# EAGLE board Parallel CS V5 repeated (EAGLE 7.2.0), part 1 of 2
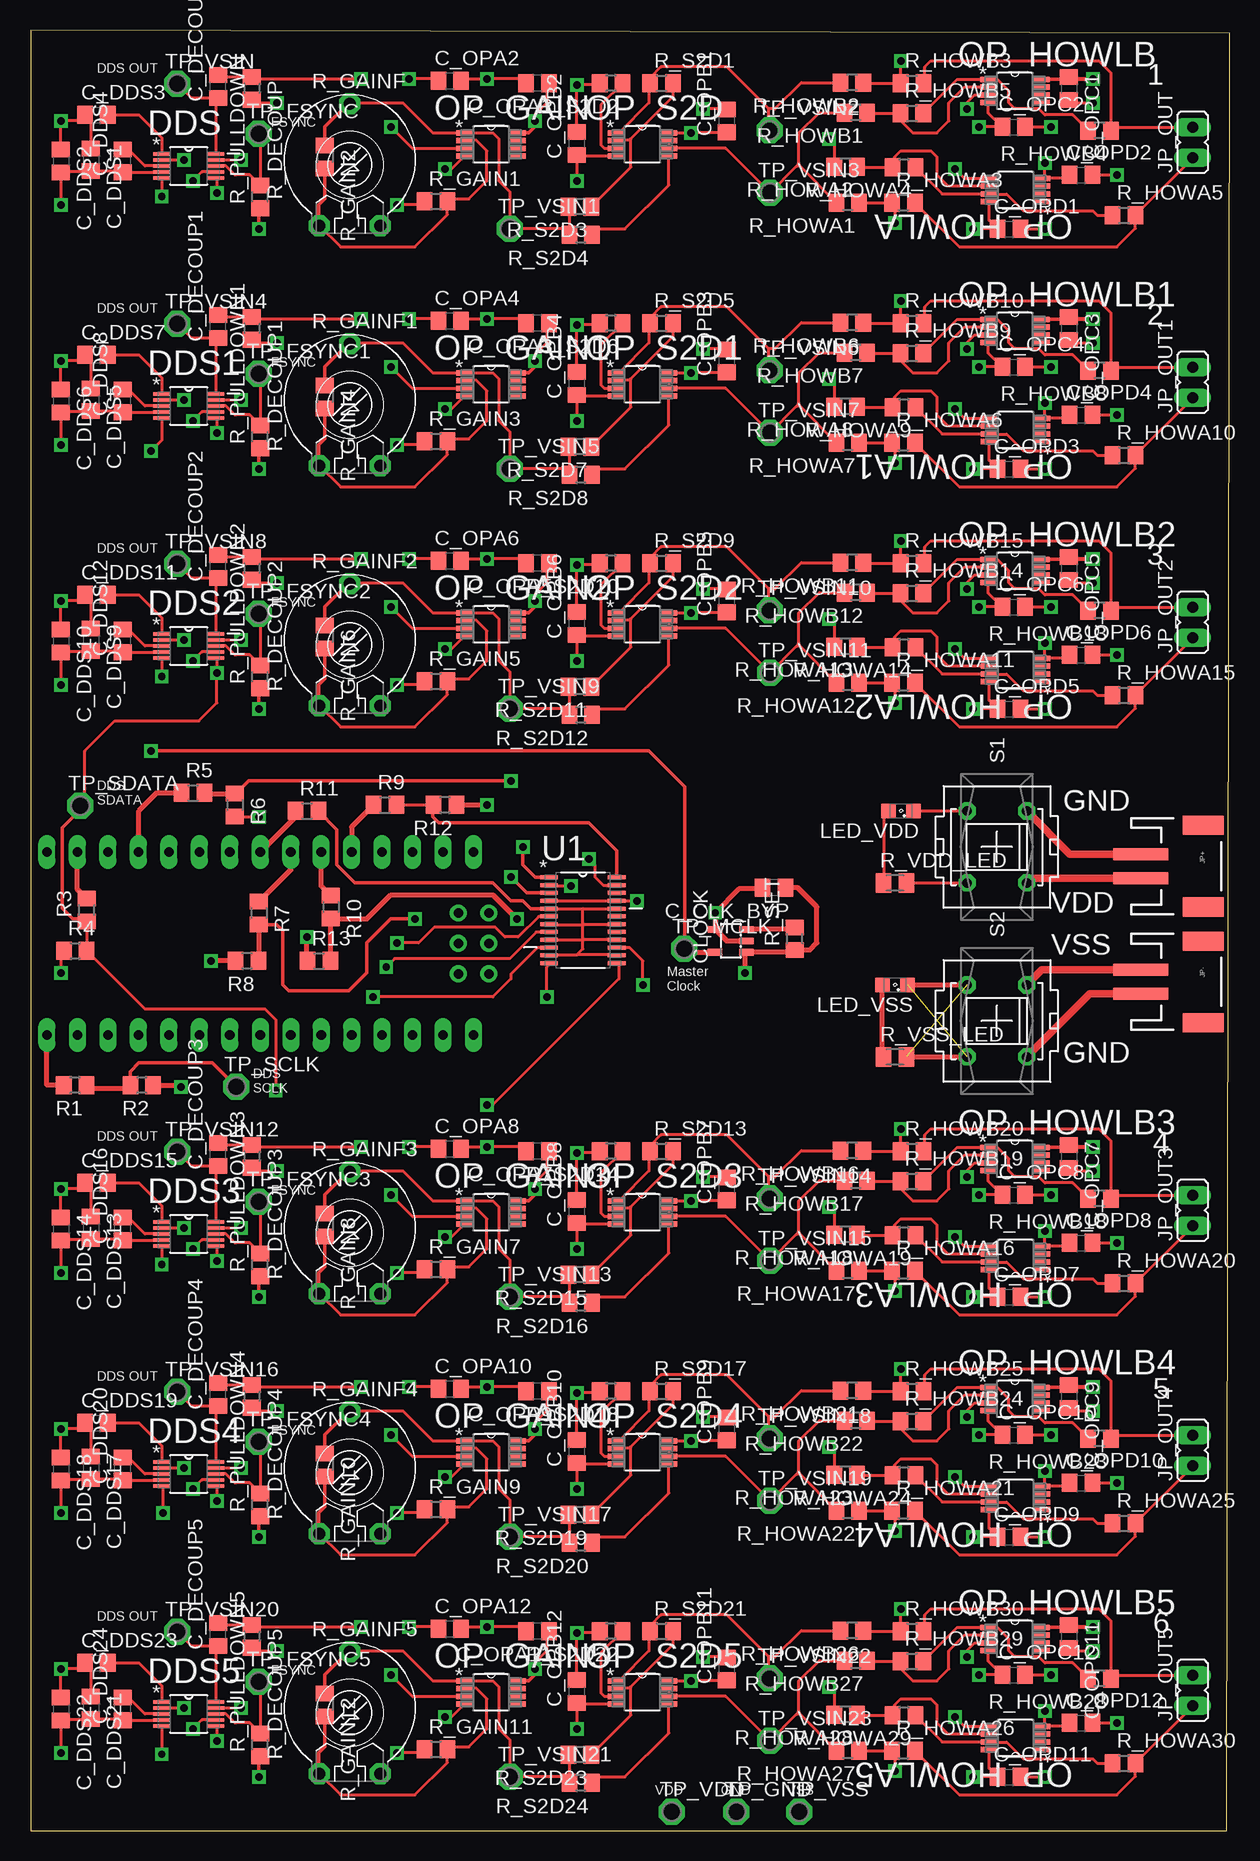
[diagram p0: board, top side]
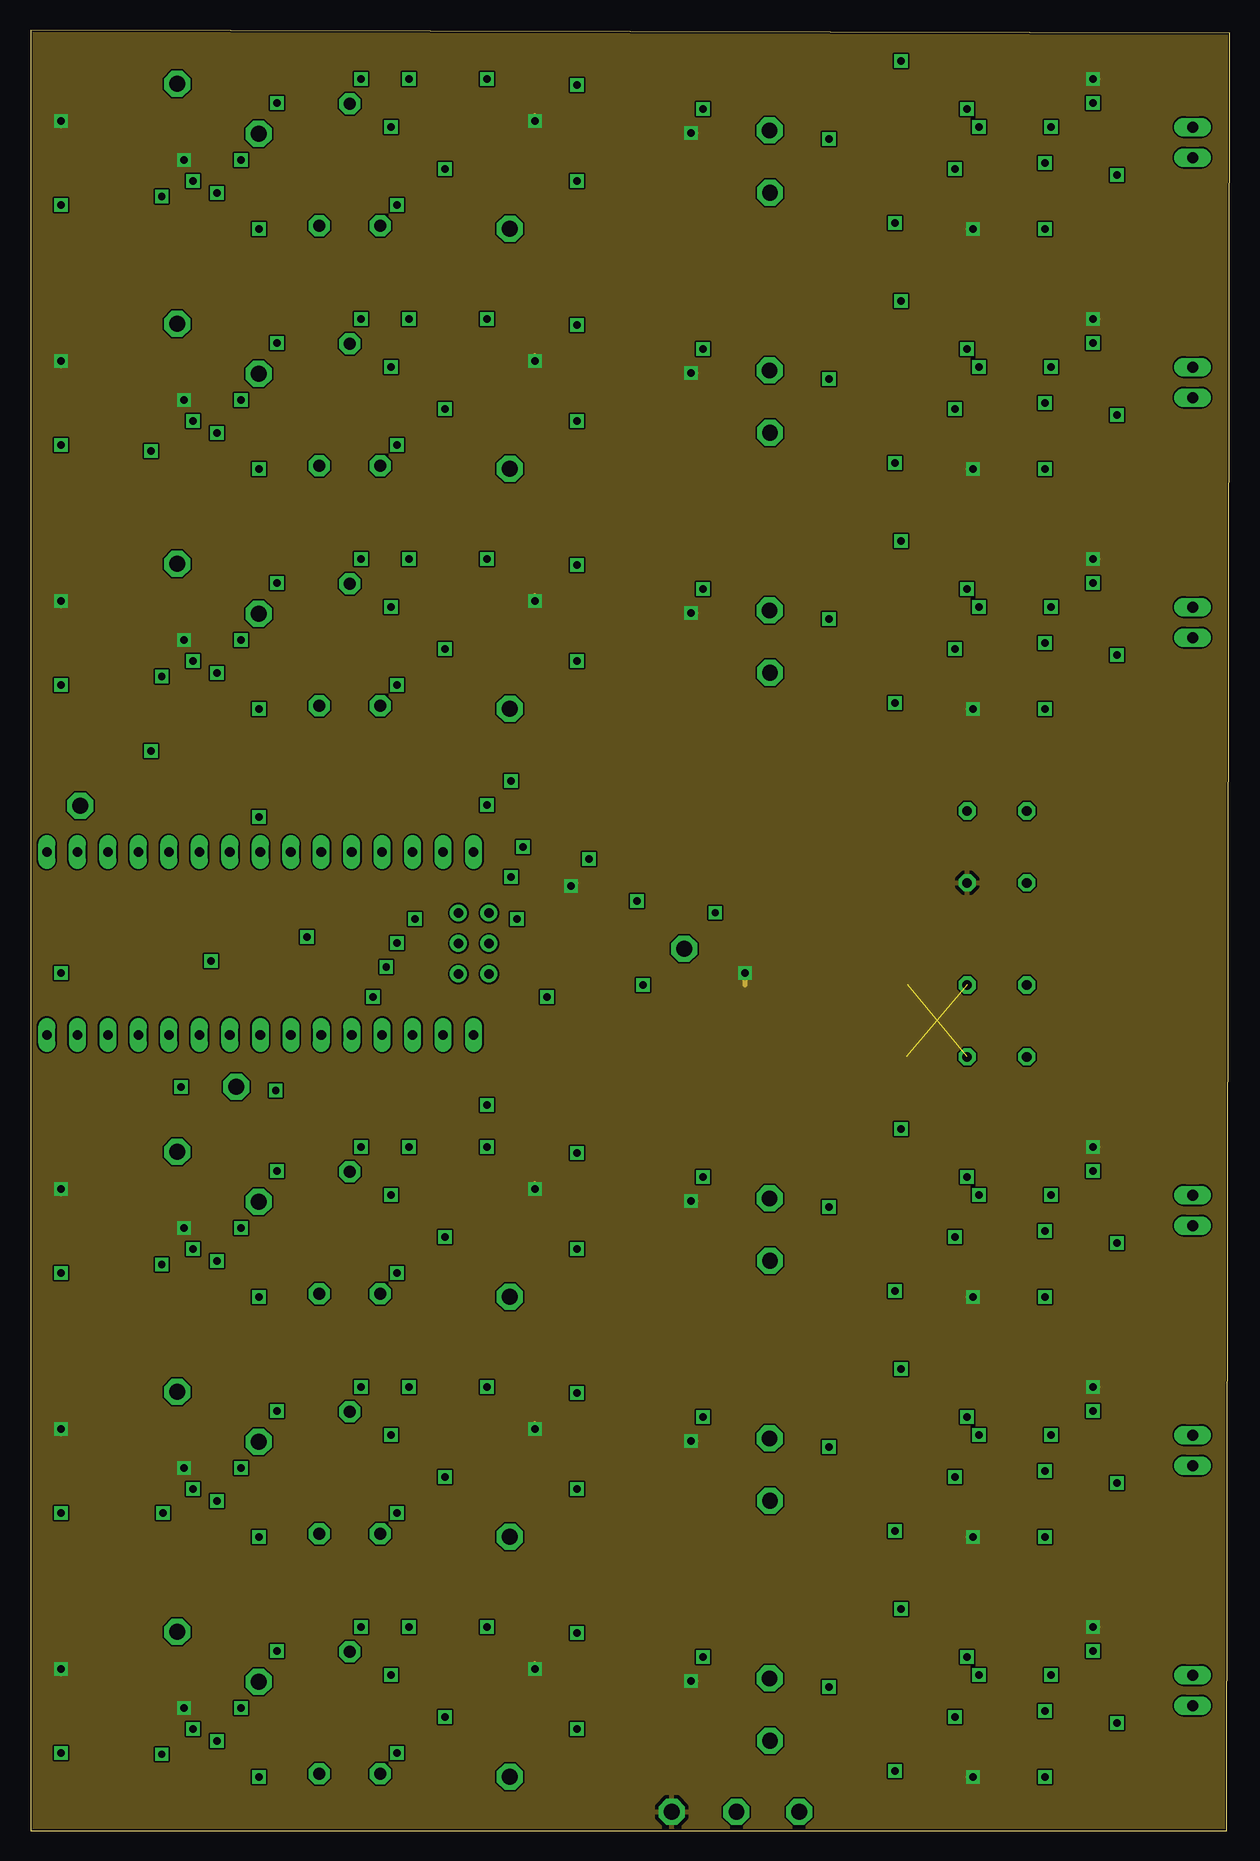
[diagram p1: board, inner layer VDD]
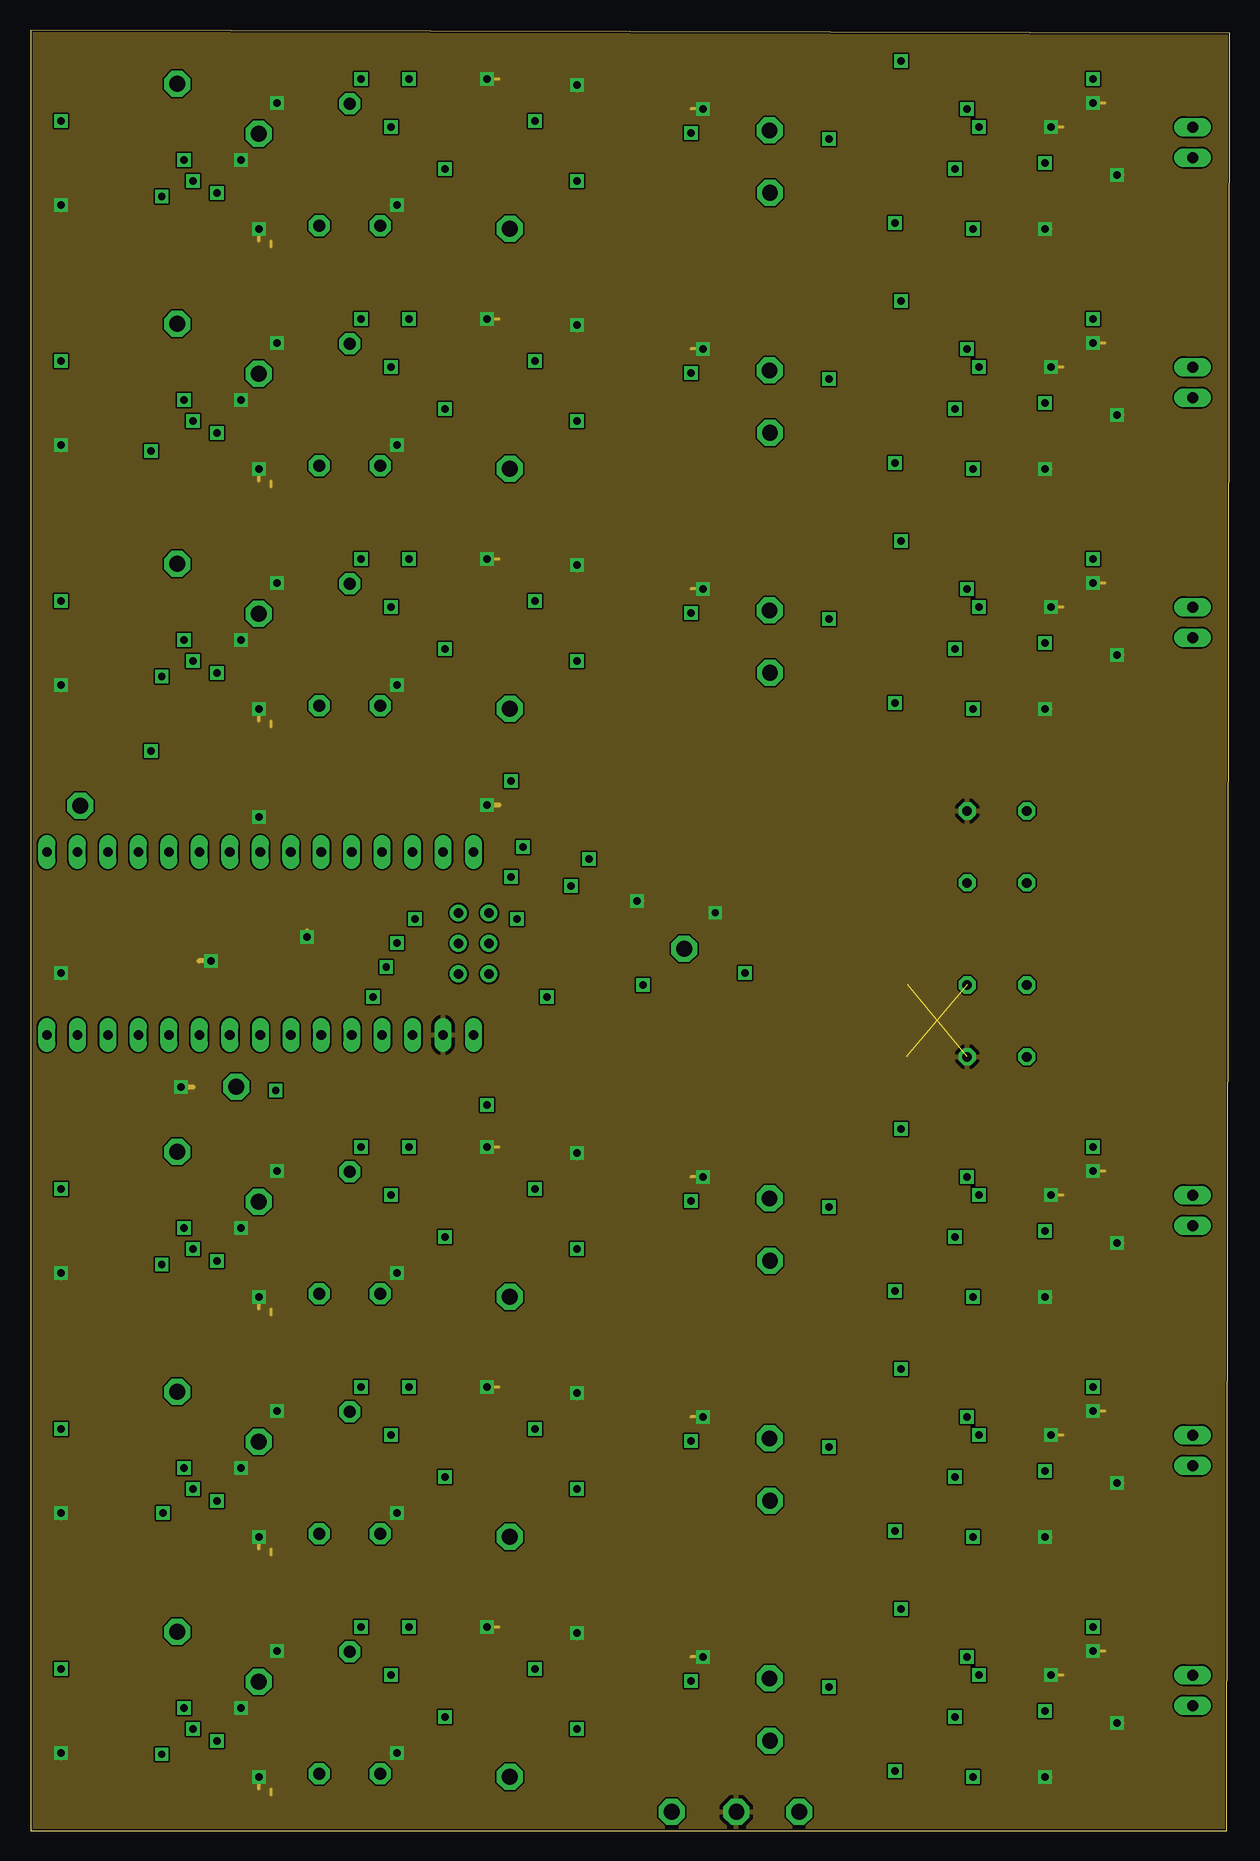
[diagram p2: board, inner layer GND]
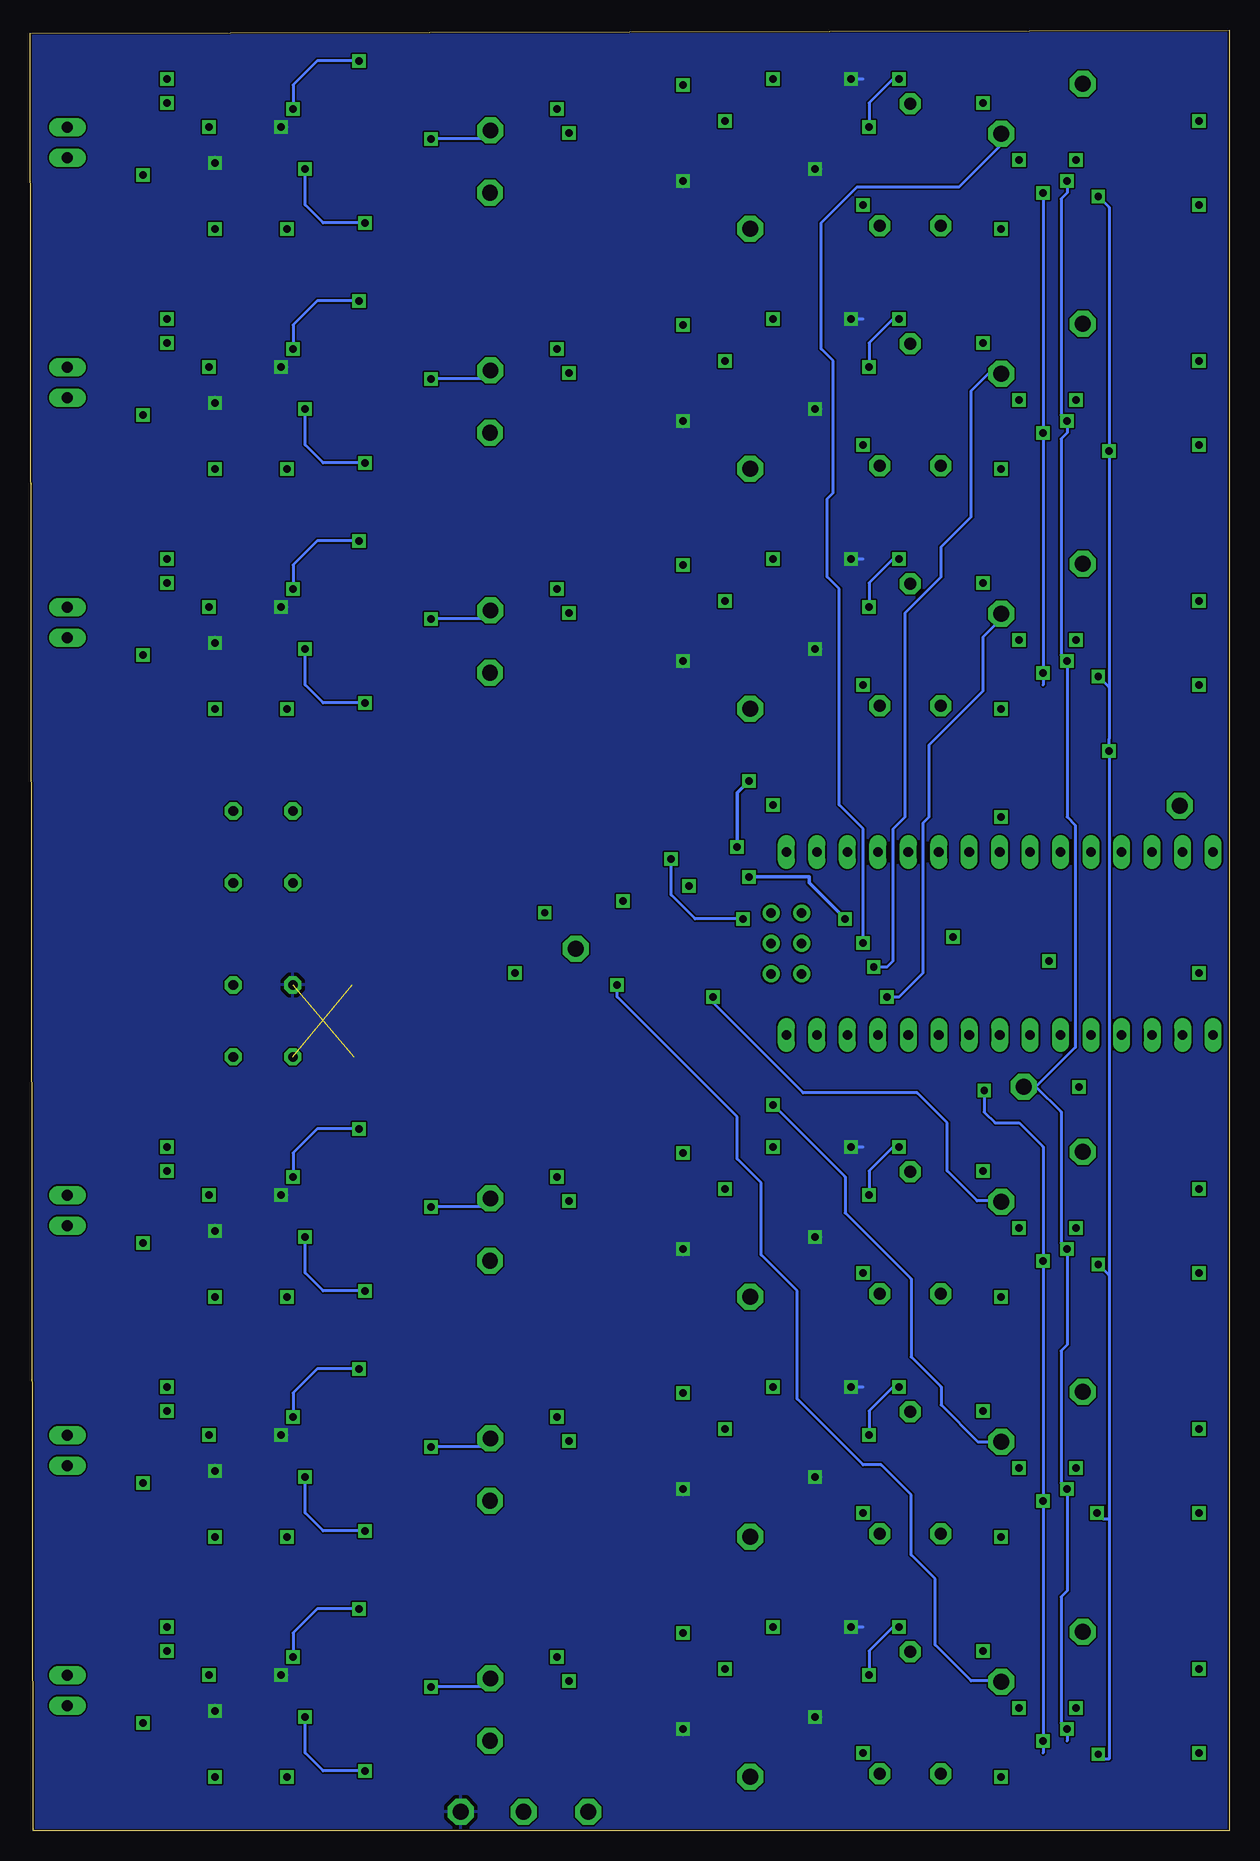
[diagram p3: board, bottom side, seen from below]

Size 99.92 x 150.08 mm. Coordinates in mm from the lower left corner, seen from the top.
Outline: 0,0 99.65,0 99.92,149.81 0,150.08 0,0
Copper layers (1*2*15*16): Top 0.035mm / dielectric 1.5mm / VDD 0.035mm / dielectric 0.15mm / GND 0.035mm / dielectric 0.2mm / Bottom 0.035mm
Design rules "SparkFun-4-layer": minimum track width 6mil, minimum drill 13mil, track to track 6mil, track to pad 6mil, pad to pad 6mil, via to via 6mil, smd to smd 6mil, copper to edge 6mil, drill to drill 8mil, minimum pad ring 12mil, minimum via ring 10mil, stop-mask expansion 4mil, vias tented up to drill 20mil, thermal gap 12mil

## Footprints (pad centres in the part's own frame; a part is rotated, then mirrored left to right if it is on the bottom)
C0805 = smd 1.3 x 1.5: 1 -0.95,0; 2 0.95,0
SOT23-5L = smd 0.55 x 1.2: 1 -0.95,-1.3; 2 0,-1.3; 3 0.95,-1.3; 4 0.95,1.3; 5 -0.95,1.3
SOP50P490X110-10N = smd 1.422 x 0.305: 1 -2.235,0.991; 2 -2.235,0.508; 3 -2.235,0; 4 -2.235,-0.508; 5 -2.235,-0.991; 6 2.235,-0.991; 7 2.235,-0.508; 8 2.235,0; 9 2.235,0.508; 10 2.235,0.991
JST-2-SMD = smd 1 x 4.6: 1 -1,-3.7; 2 1,-3.7 | smd 1.6 x 3.4: NC1 -3.4,1.5; NC2 3.4,1.5
JP1 = drill 0.914 long: 1 0,-1.27; 2 0,1.27
SML0805 = smd 1.2 x 1.2: A 1.05,0; C -1.05,0
SOP65P490X109-8N = smd 1.372 x 0.457: 1 -2.21,0.965; 2 -2.21,0.33; 3 -2.21,-0.33; 4 -2.21,-0.965; 5 2.21,-0.965; 6 2.21,-0.33; 7 2.21,0.33; 8 2.21,0.965
R0805 = smd 1.3 x 1.5: 1 -0.95,0; 2 0.95,0
PT-10 = drill 1.016 pad 1.778 octagon: 1 -2.54,-5.08; 2 2.54,-5.08; 3 0,5.08
M0805 = smd 1.3 x 1.6: 1 -0.95,0; 2 0.95,0
PVA1F = drill 0.813 octagon: 1 -2.997,2.489; 2 -2.997,-2.489; 3 2.997,2.489; 4 2.997,-2.489
P1-13 = drill 1.321 pad 2.159 octagon: TP 0,0
SOP65P640X120-24N = smd 1.473 x 0.356: 1 -2.819,3.581; 2 -2.819,2.921; 3 -2.819,2.286; 4 -2.819,1.626; 5 -2.819,0.965; 6 -2.819,0.33; 7 -2.819,-0.33; 8 -2.819,-0.965; 9 -2.819,-1.626; 10 -2.819,-2.286; 11 -2.819,-2.921; 12 -2.819,-3.581; 13 2.819,-3.581; 14 2.819,-2.921; 15 2.819,-2.286; 16 2.819,-1.626; 17 2.819,-0.965; 18 2.819,-0.33; 19 2.819,0.33; 20 2.819,0.965; 21 2.819,1.626; 22 2.819,2.286; 23 2.819,2.921; 24 2.819,3.581
NANO = drill 0.8 long: 3.3V -10.16,24.13; 5V -10.16,-1.27; A0 -10.16,19.05; A1 -10.16,16.51; A2 -10.16,13.97; A3 -10.16,11.43; A4 -10.16,8.89; A5 -10.16,6.35; A6 -10.16,3.81; A7 -10.16,1.27; AREF -10.16,21.59; D2 5.08,1.27; D3 5.08,3.81; D4 5.08,6.35; D5 5.08,8.89; D6 5.08,11.43; D7 5.08,13.97; D8 5.08,16.51; D9 5.08,19.05; D10 5.08,21.59; D11 5.08,24.13; D12 5.08,26.67; D13 -10.16,26.67; GND -10.16,-6.35; GND1 5.08,-1.27; RAW -10.16,-8.89; RST -10.16,-3.81; RST1 5.08,-3.81; RX1 5.08,-6.35; TX0 5.08,-8.89 | drill 0.8: ICSP1 -5.08,-10.16; ICSP2 -5.08,-7.62; ICSP3 -2.54,-10.16; ICSP4 -2.54,-7.62; ICSP5 0,-10.16; ICSP6 0,-7.62

## Placement (x,y rotation side)
C_CLK_BYP  0.1u  [C0805]  61.92,78.59 180 top
C_DDS1  0.1u  [C0805]  5,139.27 270 top
C_DDS2  10u  [C0805]  2.5,139.16 270 top
C_DDS3  10n  [C0805]  5.45,143 0 top
C_DDS4  100n  [C0805]  7.65,139.18 90 top
C_DDS5  0.1u  [C0805]  5,119.27 270 top
C_DDS6  10u  [C0805]  2.5,119.16 270 top
C_DDS7  10n  [C0805]  5.45,123 0 top
C_DDS8  100n  [C0805]  7.65,119.18 90 top
C_DDS9  0.1u  [C0805]  5,99.27 270 top
C_DDS10  10u  [C0805]  2.5,99.16 270 top
C_DDS11  10n  [C0805]  5.45,103 0 top
C_DDS12  100n  [C0805]  7.65,99.18 90 top
C_DDS13  0.1u  [C0805]  5,50.27 270 top
C_DDS14  10u  [C0805]  2.5,50.16 270 top
C_DDS15  10n  [C0805]  5.45,54 0 top
C_DDS16  100n  [C0805]  7.65,50.18 90 top
C_DDS17  0.1u  [C0805]  5,30.27 270 top
C_DDS18  10u  [C0805]  2.5,30.16 270 top
C_DDS19  10n  [C0805]  5.45,34 0 top
C_DDS20  100n  [C0805]  7.65,30.18 90 top
C_DDS21  0.1u  [C0805]  5,10.27 270 top
C_DDS22  10u  [C0805]  2.5,10.16 270 top
C_DDS23  10n  [C0805]  5.45,14 0 top
C_DDS24  100n  [C0805]  7.65,10.18 90 top
C_DECOUP  1u  [C0805]  15.59,145.38 90 top
C_DECOUP1  1u  [C0805]  15.59,125.38 90 top
C_DECOUP2  1u  [C0805]  15.59,105.38 90 top
C_DECOUP3  1u  [C0805]  15.59,56.38 90 top
C_DECOUP4  1u  [C0805]  15.59,36.38 90 top
C_DECOUP5  1u  [C0805]  15.59,16.38 90 top
C_OPA1  0.1u  [C0805]  42.21,145.65 180 top
C_OPA2  0.1u  [C0805]  34.9,145.85 0 top
C_OPA3  0.1u  [C0805]  42.21,125.65 180 top
C_OPA4  0.1u  [C0805]  34.9,125.85 0 top
C_OPA5  0.1u  [C0805]  42.21,105.65 180 top
C_OPA6  0.1u  [C0805]  34.9,105.85 0 top
C_OPA7  0.1u  [C0805]  42.21,56.65 180 top
C_OPA8  0.1u  [C0805]  34.9,56.85 0 top
C_OPA9  0.1u  [C0805]  42.21,36.65 180 top
C_OPA10  0.1u  [C0805]  34.9,36.85 0 top
C_OPA11  0.1u  [C0805]  42.21,16.65 180 top
C_OPA12  0.1u  [C0805]  34.9,16.85 0 top
C_OPB1  0.1u  [C0805]  58,142.51 90 top
C_OPB2  0.1u  [C0805]  45.5,140.62 90 top
C_OPB3  0.1u  [C0805]  58,122.51 90 top
C_OPB4  0.1u  [C0805]  45.5,120.62 90 top
C_OPB5  0.1u  [C0805]  58,102.51 90 top
C_OPB6  0.1u  [C0805]  45.5,100.62 90 top
C_OPB7  0.1u  [C0805]  58,53.51 90 top
C_OPB8  0.1u  [C0805]  45.5,51.62 90 top
C_OPB9  0.1u  [C0805]  58,33.51 90 top
C_OPB10  0.1u  [C0805]  45.5,31.62 90 top
C_OPB11  0.1u  [C0805]  58,13.51 90 top
C_OPB12  0.1u  [C0805]  45.5,11.62 90 top
C_OPC1  0.1u  [C0805]  86.5,145.21 270 top
C_OPC2  0.1u  [C0805]  81.9,142 0 top
C_OPC3  0.1u  [C0805]  86.5,125.21 270 top
C_OPC4  0.1u  [C0805]  81.9,122 0 top
C_OPC5  0.1u  [C0805]  86.5,105.21 270 top
C_OPC6  0.1u  [C0805]  81.9,102 0 top
C_OPC7  0.1u  [C0805]  86.5,56.21 270 top
C_OPC8  0.1u  [C0805]  81.9,53 0 top
C_OPC9  0.1u  [C0805]  86.5,36.21 270 top
C_OPC10  0.1u  [C0805]  81.9,33 0 top
C_OPC11  0.1u  [C0805]  86.5,16.21 270 top
C_OPC12  0.1u  [C0805]  81.9,13 0 top
C_OPD1  0.1u  [C0805]  81.5,133.5 0 top
C_OPD2  0.1u  [C0805]  87.5,138 0 top
C_OPD3  0.1u  [C0805]  81.5,113.5 0 top
C_OPD4  0.1u  [C0805]  87.5,118 0 top
C_OPD5  0.1u  [C0805]  81.5,93.5 0 top
C_OPD6  0.1u  [C0805]  87.5,98 0 top
C_OPD7  0.1u  [C0805]  81.5,44.5 0 top
C_OPD8  0.1u  [C0805]  87.5,49 0 top
C_OPD9  0.1u  [C0805]  81.5,24.5 0 top
C_OPD10  0.1u  [C0805]  87.5,29 0 top
C_OPD11  0.1u  [C0805]  81.5,4.5 0 top
C_OPD12  0.1u  [C0805]  87.5,9 0 top
CLOCK  LTC69000  [SOT23-5L]  58.32,74.18 90 top
DDS  AD9833BRMZ  [SOP50P490X110-10N]  13.15,138.75 0 top
DDS1  AD9833BRMZ  [SOP50P490X110-10N]  13.15,118.75 0 top
DDS2  AD9833BRMZ  [SOP50P490X110-10N]  13.15,98.75 0 top
DDS3  AD9833BRMZ  [SOP50P490X110-10N]  13.15,49.75 0 top
DDS4  AD9833BRMZ  [SOP50P490X110-10N]  13.15,29.75 0 top
DDS5  AD9833BRMZ  [SOP50P490X110-10N]  13.15,9.75 0 top
JP+  PWR  [JST-2-SMD]  96.18,80.4 270 top
JP-  PWR  [JST-2-SMD]  96.18,70.75 270 top
JP_OUT  [JP1]  96.8,140.71 0 top
JP_OUT1  [JP1]  96.8,120.71 0 top
JP_OUT2  [JP1]  96.8,100.71 0 top
JP_OUT3  [JP1]  96.8,51.71 0 top
JP_OUT4  [JP1]  96.8,31.71 0 top
JP_OUT5  [JP1]  96.8,11.71 0 top
LED_VDD  [SML0805]  72.5,85 180 top
LED_VSS  [SML0805]  72,70.5 180 top
OP_GAIN  RC4560SOP65  [SOP65P490X109-8N]  38.35,140.55 0 top
OP_GAIN1  RC4560SOP65  [SOP65P490X109-8N]  38.35,120.55 0 top
OP_GAIN2  RC4560SOP65  [SOP65P490X109-8N]  38.35,100.55 0 top
OP_GAIN3  RC4560SOP65  [SOP65P490X109-8N]  38.35,51.55 0 top
OP_GAIN4  RC4560SOP65  [SOP65P490X109-8N]  38.35,31.55 0 top
OP_GAIN5  RC4560SOP65  [SOP65P490X109-8N]  38.35,11.55 0 top
OP_HOWLA  RC4560SOP65  [SOP65P490X109-8N]  82.05,136.75 180 top
OP_HOWLA1  RC4560SOP65  [SOP65P490X109-8N]  82.05,116.75 180 top
OP_HOWLA2  RC4560SOP65  [SOP65P490X109-8N]  82.05,96.75 180 top
OP_HOWLA3  RC4560SOP65  [SOP65P490X109-8N]  82.05,47.75 180 top
OP_HOWLA4  RC4560SOP65  [SOP65P490X109-8N]  82.05,27.75 180 top
OP_HOWLA5  RC4560SOP65  [SOP65P490X109-8N]  82.05,7.75 180 top
OP_HOWLB  RC4560SOP65  [SOP65P490X109-8N]  82,145 0 top
OP_HOWLB1  RC4560SOP65  [SOP65P490X109-8N]  82,125 0 top
OP_HOWLB2  RC4560SOP65  [SOP65P490X109-8N]  82,105 0 top
OP_HOWLB3  RC4560SOP65  [SOP65P490X109-8N]  82,56 0 top
OP_HOWLB4  RC4560SOP65  [SOP65P490X109-8N]  82,36 0 top
OP_HOWLB5  RC4560SOP65  [SOP65P490X109-8N]  82,16 0 top
OP_S2D  RC4560SOP65  [SOP65P490X109-8N]  50.95,140.55 0 top
OP_S2D1  RC4560SOP65  [SOP65P490X109-8N]  50.95,120.55 0 top
OP_S2D2  RC4560SOP65  [SOP65P490X109-8N]  50.95,100.55 0 top
OP_S2D3  RC4560SOP65  [SOP65P490X109-8N]  50.95,51.55 0 top
OP_S2D4  RC4560SOP65  [SOP65P490X109-8N]  50.95,31.55 0 top
OP_S2D5  RC4560SOP65  [SOP65P490X109-8N]  50.95,11.55 0 top
R1  10k  [R0805]  3.68,62.15 180 top
R2  20k  [R0805]  9.23,62.15 180 top
R3  10k  [R0805]  4.65,76.74 90 top
R4  20k  [R0805]  3.69,73.35 0 top
R5  10k  [R0805]  13.5,86.5 0 top
R6  20k  [R0805]  17,85.5 270 top
R7  10k  [R0805]  19,76.5 270 top
R8  20k  [R0805]  18,72.5 180 top
R9  10k  [R0805]  29.5,85.5 0 top
R10  10k  [R0805]  25,77 270 top
R11  10k  [R0805]  23,85 0 top
R12  20k  [R0805]  34.5,85.5 180 top
R13  20k  [R0805]  24,72.5 0 top
R_DECOUP  10k  [R0805]  18.41,145.22 270 top
R_DECOUP1  10k  [R0805]  18.41,125.22 270 top
R_DECOUP2  10k  [R0805]  18.41,105.22 270 top
R_DECOUP3  10k  [R0805]  18.41,56.22 270 top
R_DECOUP4  10k  [R0805]  18.41,36.22 270 top
R_DECOUP5  10k  [R0805]  18.41,16.22 270 top
R_GAIN1  10k  [R0805]  33.75,135.8 0 top
R_GAIN2  1  [R0805]  24.5,139.5 270 top
R_GAIN3  10k  [R0805]  33.75,115.8 0 top
R_GAIN4  1  [R0805]  24.5,119.5 270 top
R_GAIN5  10k  [R0805]  33.75,95.8 0 top
R_GAIN6  1  [R0805]  24.5,99.5 270 top
R_GAIN7  10k  [R0805]  33.75,46.8 0 top
R_GAIN8  1  [R0805]  24.5,50.5 270 top
R_GAIN9  10k  [R0805]  33.75,26.8 0 top
R_GAIN10  1  [R0805]  24.5,30.5 270 top
R_GAIN11  10k  [R0805]  33.75,6.8 0 top
R_GAIN12  1  [R0805]  24.5,10.5 270 top
R_GAINF  [PT-10]  26.57,138.85 0 top
R_GAINF1  [PT-10]  26.57,118.85 0 top
R_GAINF2  [PT-10]  26.57,98.85 0 top
R_GAINF3  [PT-10]  26.57,49.85 0 top
R_GAINF4  [PT-10]  26.57,29.85 0 top
R_GAINF5  [PT-10]  26.57,9.85 0 top
R_HOWA1  100k  [R0805]  68.07,135.7 180 top
R_HOWA2  100k  [R0805]  67.89,138.7 180 top
R_HOWA3  100k  [R0805]  72.71,135.7 0 top
R_HOWA4  100k  [R0805]  72.75,138.65 180 top
R_HOWA5  10k  [R0805]  91.09,134.65 0 top
R_HOWA6  100k  [R0805]  72.71,115.7 0 top
R_HOWA7  100k  [R0805]  68.07,115.7 180 top
R_HOWA8  100k  [R0805]  67.89,118.7 180 top
R_HOWA9  100k  [R0805]  72.75,118.65 180 top
R_HOWA10  10k  [R0805]  91.09,114.65 0 top
R_HOWA11  100k  [R0805]  72.71,95.7 0 top
R_HOWA12  100k  [R0805]  68.07,95.7 180 top
R_HOWA13  100k  [R0805]  67.89,98.7 180 top
R_HOWA14  100k  [R0805]  72.75,98.65 180 top
R_HOWA15  10k  [R0805]  91.09,94.65 0 top
R_HOWA16  100k  [R0805]  72.71,46.7 0 top
R_HOWA17  100k  [R0805]  68.07,46.7 180 top
R_HOWA18  100k  [R0805]  67.89,49.7 180 top
R_HOWA19  100k  [R0805]  72.75,49.65 180 top
R_HOWA20  10k  [R0805]  91.09,45.65 0 top
R_HOWA21  100k  [R0805]  72.71,26.7 0 top
R_HOWA22  100k  [R0805]  68.07,26.7 180 top
R_HOWA23  100k  [R0805]  67.89,29.7 180 top
R_HOWA24  100k  [R0805]  72.75,29.65 180 top
R_HOWA25  10k  [R0805]  91.09,25.65 0 top
R_HOWA26  100k  [R0805]  72.71,6.7 0 top
R_HOWA27  100k  [R0805]  68.07,6.7 180 top
R_HOWA28  100k  [R0805]  67.89,9.7 180 top
R_HOWA29  100k  [R0805]  72.75,9.65 180 top
R_HOWA30  10k  [R0805]  91.09,5.65 0 top
R_HOWB1  100k  [R0805]  68.73,143.2 180 top
R_HOWB2  100k  [R0805]  68.41,145.7 180 top
R_HOWB3  100k  [R0805]  73.43,145.65 0 top
R_HOWB4  10k  [R0805]  89.05,141.7 180 top
R_HOWB5  100k  [R0805]  73.41,143.15 0 top
R_HOWB6  100k  [R0805]  68.41,125.7 180 top
R_HOWB7  100k  [R0805]  68.73,123.2 180 top
R_HOWB8  10k  [R0805]  89.05,121.7 180 top
R_HOWB9  100k  [R0805]  73.41,123.15 0 top
R_HOWB10  100k  [R0805]  73.43,125.65 0 top
R_HOWB11  100k  [R0805]  68.41,105.7 180 top
R_HOWB12  100k  [R0805]  68.73,103.2 180 top
R_HOWB13  10k  [R0805]  89.05,101.7 180 top
R_HOWB14  100k  [R0805]  73.41,103.15 0 top
R_HOWB15  100k  [R0805]  73.43,105.65 0 top
R_HOWB16  100k  [R0805]  68.41,56.7 180 top
R_HOWB17  100k  [R0805]  68.73,54.2 180 top
R_HOWB18  10k  [R0805]  89.05,52.7 180 top
R_HOWB19  100k  [R0805]  73.41,54.15 0 top
R_HOWB20  100k  [R0805]  73.43,56.65 0 top
R_HOWB21  100k  [R0805]  68.41,36.7 180 top
R_HOWB22  100k  [R0805]  68.73,34.2 180 top
R_HOWB23  10k  [R0805]  89.05,32.7 180 top
R_HOWB24  100k  [R0805]  73.41,34.15 0 top
R_HOWB25  100k  [R0805]  73.43,36.65 0 top
R_HOWB26  100k  [R0805]  68.41,16.7 180 top
R_HOWB27  100k  [R0805]  68.73,14.2 180 top
R_HOWB28  10k  [R0805]  89.05,12.7 180 top
R_HOWB29  100k  [R0805]  73.41,14.15 0 top
R_HOWB30  100k  [R0805]  73.43,16.65 0 top
R_PULLDOWN  20k  [R0805]  19.09,136.18 90 top
R_PULLDOWN1  20k  [R0805]  19.09,116.18 90 top
R_PULLDOWN2  20k  [R0805]  19.09,96.18 90 top
R_PULLDOWN3  20k  [R0805]  19.09,47.18 90 top
R_PULLDOWN4  20k  [R0805]  19.09,27.18 90 top
R_PULLDOWN5  20k  [R0805]  19.09,7.18 90 top
R_S2D1  10k  [R0805]  52.54,145.65 0 top
R_S2D2  10k  [R0805]  48.35,145.65 180 top
R_S2D3  10k  [R0805]  45.74,135.35 180 top
R_S2D4  10k  [R0805]  45.82,133 180 top
R_S2D5  10k  [R0805]  52.54,125.65 0 top
R_S2D6  10k  [R0805]  48.35,125.65 180 top
R_S2D7  10k  [R0805]  45.74,115.35 180 top
R_S2D8  10k  [R0805]  45.82,113 180 top
R_S2D9  10k  [R0805]  52.54,105.65 0 top
R_S2D10  10k  [R0805]  48.35,105.65 180 top
R_S2D11  10k  [R0805]  45.74,95.35 180 top
R_S2D12  10k  [R0805]  45.82,93 180 top
R_S2D13  10k  [R0805]  52.54,56.65 0 top
R_S2D14  10k  [R0805]  48.35,56.65 180 top
R_S2D15  10k  [R0805]  45.74,46.35 180 top
R_S2D16  10k  [R0805]  45.82,44 180 top
R_S2D17  10k  [R0805]  52.54,36.65 0 top
R_S2D18  10k  [R0805]  48.35,36.65 180 top
R_S2D19  10k  [R0805]  45.74,26.35 180 top
R_S2D20  10k  [R0805]  45.82,24 180 top
R_S2D21  10k  [R0805]  52.54,16.65 0 top
R_S2D22  10k  [R0805]  48.35,16.65 180 top
R_S2D23  10k  [R0805]  45.74,6.35 180 top
R_S2D24  10k  [R0805]  45.82,4 180 top
R_SET  20k  [R0805]  63.65,74.35 90 top
R_VDD_LED  1k  [M0805]  72,79 0 top
R_VSS_LED  1k  [M0805]  72,64.5 0 top
S1  PVA1F  [PVA1F]  80.5,82 90 top
S2  PVA1F  [PVA1F]  80.5,67.5 90 top
TP_FSYNC  PTR1PAD1-13  [P1-13]  18.97,141.43 0 top
TP_FSYNC1  PTR1PAD1-13  [P1-13]  18.97,121.43 0 top
TP_FSYNC2  PTR1PAD1-13  [P1-13]  18.97,101.43 0 top
TP_FSYNC3  PTR1PAD1-13  [P1-13]  18.97,52.43 0 top
TP_FSYNC4  PTR1PAD1-13  [P1-13]  18.97,32.43 0 top
TP_FSYNC5  PTR1PAD1-13  [P1-13]  18.97,12.43 0 top
TP_GND  PTR1PAD1-13  [P1-13]  58.79,1.59 0 top
TP_MCLK  PTR1PAD1-13  [P1-13]  54.43,73.51 0 top
TP_SCLK  PTR1PAD1-13  [P1-13]  17.11,62.01 0 top
TP_SDATA  PTR1PAD1-13  [P1-13]  4.11,85.43 0 top
TP_VDD  PTR1PAD1-13  [P1-13]  53.4,1.59 0 top
TP_VSIN  PTR1PAD1-13  [P1-13]  12.18,145.59 0 top
TP_VSIN1  PTR1PAD1-13  [P1-13]  39.91,133.51 0 top
TP_VSIN2  PTR1PAD1-13  [P1-13]  61.55,141.71 0 top
TP_VSIN3  PTR1PAD1-13  [P1-13]  61.59,136.51 0 top
TP_VSIN4  PTR1PAD1-13  [P1-13]  12.18,125.59 0 top
TP_VSIN5  PTR1PAD1-13  [P1-13]  39.91,113.51 0 top
TP_VSIN6  PTR1PAD1-13  [P1-13]  61.55,121.71 0 top
TP_VSIN7  PTR1PAD1-13  [P1-13]  61.59,116.51 0 top
TP_VSIN8  PTR1PAD1-13  [P1-13]  12.18,105.59 0 top
TP_VSIN9  PTR1PAD1-13  [P1-13]  39.91,93.51 0 top
TP_VSIN10  PTR1PAD1-13  [P1-13]  61.55,101.71 0 top
TP_VSIN11  PTR1PAD1-13  [P1-13]  61.59,96.51 0 top
TP_VSIN12  PTR1PAD1-13  [P1-13]  12.18,56.59 0 top
TP_VSIN13  PTR1PAD1-13  [P1-13]  39.91,44.51 0 top
TP_VSIN14  PTR1PAD1-13  [P1-13]  61.55,52.71 0 top
TP_VSIN15  PTR1PAD1-13  [P1-13]  61.59,47.51 0 top
TP_VSIN16  PTR1PAD1-13  [P1-13]  12.18,36.59 0 top
TP_VSIN17  PTR1PAD1-13  [P1-13]  39.91,24.51 0 top
TP_VSIN18  PTR1PAD1-13  [P1-13]  61.55,32.71 0 top
TP_VSIN19  PTR1PAD1-13  [P1-13]  61.59,27.51 0 top
TP_VSIN20  PTR1PAD1-13  [P1-13]  12.18,16.59 0 top
TP_VSIN21  PTR1PAD1-13  [P1-13]  39.91,4.51 0 top
TP_VSIN22  PTR1PAD1-13  [P1-13]  61.55,12.71 0 top
TP_VSIN23  PTR1PAD1-13  [P1-13]  61.59,7.51 0 top
TP_VSS  PTR1PAD1-13  [P1-13]  64.01,1.59 0 top
U1  ADG714BRUZ  [SOP65P640X120-24N]  46,75.89 0 top
U$1  NANO  [NANO]  28,76.5 90 top

## Library data of the parts
C_CLK_BYP C_DDS1-C_DDS24 C_DECOUP C_DECOUP1-C_DECOUP5 C_OPA1-C_OPA12 C_OPB1-C_OPB12 C_OPC1-C_OPC12 C_OPD1-C_OPD12 R1-R13 R_SET R_VDD_LED R_VSS_LED = resistor
CLOCK = LTC6900
DDS DDS1-DDS5 = ad9833; MPN: AD9833BRMZ; OC_FARNELL: 1581966; OC_NEWARK: 19M1014; PACKAGE: MSOP-10; SUPPLIER: Analog Devices
JP+ JP- = SwitchBoard
JP_OUT JP_OUT1-JP_OUT5 = jumper
LED_VDD LED_VSS = led
OP_GAIN OP_GAIN1-OP_GAIN5 OP_HOWLA OP_HOWLA1-OP_HOWLA5 OP_HOWLB OP_HOWLB1-OP_HOWLB5 OP_S2D OP_S2D1-OP_S2D5 = RC4560
R_DECOUP R_DECOUP1-R_DECOUP5 R_GAIN1-R_GAIN12 R_GAINF R_GAINF1-R_GAINF5 R_HOWA1-R_HOWA30 R_HOWB1-R_HOWB30 R_PULLDOWN R_PULLDOWN1-R_PULLDOWN5 R_S2D1-R_S2D24 = rcl
S1 S2 = switch-misc
TP_FSYNC TP_FSYNC1-TP_FSYNC5 TP_GND TP_MCLK TP_SCLK TP_SDATA TP_VDD TP_VSIN TP_VSIN1-TP_VSIN23 TP_VSS = testpad
U1 = SwitchBoard; MPN: ADG714BRUZ; OC_FARNELL: 9604367; OC_NEWARK: 59K1531; PACKAGE: TSSOP-24; SUPPLIER: Analog Devices
U$1 = Arduino-clone

## Nets
CLK_OUT: CLOCK.5 DDS1.5 DDS2.5 DDS3.5 DDS4.5 DDS5.5 DDS.5 TP_MCLK.TP
COMP: C_DDS3.2 DDS.1
COMP1: C_DDS7.2 DDS1.1
COMP2: C_DDS11.2 DDS2.1
COMP3: C_DDS15.2 DDS3.1
COMP4: C_DDS19.2 DDS4.1
COMP5: C_DDS23.2 DDS5.1
DDS_SCLK: DDS1.7 DDS2.7 DDS3.7 DDS4.7 DDS5.7 DDS.7 R1.1 R2.2 TP_SCLK.TP
DDS_SCLK_5V: R1.2 U$1.D13
DDS_SDATA: DDS1.6 DDS2.6 DDS3.6 DDS4.6 DDS5.6 DDS.6 R3.1 R4.2 TP_SDATA.TP
FSYNC_CS1: DDS.8 R_PULLDOWN.2 TP_FSYNC.TP U1.6
FSYNC_CS2: DDS1.8 R_PULLDOWN1.2 TP_FSYNC1.TP U1.8
FSYNC_CS3: DDS2.8 R_PULLDOWN2.2 TP_FSYNC2.TP U1.10
FSYNC_CS4: DDS3.8 R_PULLDOWN3.2 TP_FSYNC3.TP U1.12
FSYNC_CS5: DDS4.8 R_PULLDOWN4.2 TP_FSYNC4.TP U1.13
FSYNC_CS6: DDS5.8 R_PULLDOWN5.2 TP_FSYNC5.TP U1.15
FSYNC_CS7: U1.17
FSYNC_CS8: U1.19
FSYNC_IN: R11.2 U1.5 U1.7 U1.9 U1.11 U1.14 U1.16 U1.18 U1.20
FSYNC_IN_5V: R11.1 U$1.D5
GND: C_CLK_BYP.2 C_DDS1.2 C_DDS2.2 C_DDS4.1 C_DDS5.2 C_DDS6.2 C_DDS8.1 C_DDS9.2 C_DDS10.2 C_DDS12.1 C_DDS13.2 C_DDS14.2 C_DDS16.1 C_DDS17.2 C_DDS18.2 C_DDS20.1 C_DDS21.2 C_DDS22.2 C_DDS24.1 C_OPA1.2 C_OPA2.2 C_OPA3.2 C_OPA4.2 C_OPA5.2 C_OPA6.2 C_OPA7.2 C_OPA8.2 C_OPA9.2 C_OPA10.2 C_OPA11.2 C_OPA12.2 C_OPB1.2 C_OPB2.2 C_OPB3.2 C_OPB4.2 C_OPB5.2 C_OPB6.2 C_OPB7.2 C_OPB8.2 C_OPB9.2 C_OPB10.2 C_OPB11.2 C_OPB12.2 C_OPC1.2 C_OPC2.2 C_OPC3.2 C_OPC4.2 C_OPC5.2 C_OPC6.2 C_OPC7.2 C_OPC8.2 C_OPC9.2 C_OPC10.2 C_OPC11.2 C_OPC12.2 C_OPD1.2 C_OPD2.2 C_OPD3.2 C_OPD4.2 C_OPD5.2 C_OPD6.2 C_OPD7.2 C_OPD8.2 C_OPD9.2 C_OPD10.2 C_OPD11.2 C_OPD12.2 CLOCK.2 CLOCK.4 DDS1.4 DDS1.9 DDS2.4 DDS2.9 DDS3.4 DDS3.9 DDS4.4 DDS4.9 DDS5.4 DDS5.9 DDS.4 DDS.9 LED_VDD.C LED_VSS.C R2.1 R4.1 R6.2 R8.2 R12.1 R13.1 R_DECOUP1.2 R_DECOUP2.2 R_DECOUP3.2 R_DECOUP4.2 R_DECOUP5.2 R_DECOUP.2 R_GAIN1.1 R_GAIN3.1 R_GAIN5.1 R_GAIN7.1 R_GAIN9.1 R_GAIN11.1 R_PULLDOWN1.1 R_PULLDOWN2.1 R_PULLDOWN3.1 R_PULLDOWN4.1 R_PULLDOWN5.1 R_PULLDOWN.1 R_S2D2.2 R_S2D6.2 R_S2D10.2 R_S2D14.2 R_S2D18.2 R_S2D22.2 S1.3 S2.1 TP_GND.TP U1.4 U1.21 U$1.GND
N$1: C_DDS4.2 DDS.3
N$2: CLOCK.3 R_SET.2
N$3: OP_GAIN.1 R_GAIN2.1 R_GAINF.3 R_S2D3.2 R_S2D4.2 TP_VSIN1.TP
N$4: OP_S2D.6 OP_S2D.7 R_HOWA1.2 R_HOWB1.2 TP_VSIN3.TP
N$5: OP_GAIN.2 R_GAIN1.2 R_GAIN2.2 R_GAINF.1
N$6: OP_S2D.5 R_S2D4.1
N$7: OP_HOWLA.5 R_HOWA1.1 R_HOWA3.1
N$8: OP_S2D.1 R_HOWA2.2 R_HOWB2.2 R_S2D1.1 TP_VSIN2.TP
N$9: OP_S2D.3 R_S2D2.1
N$10: OP_S2D.2 R_S2D1.2 R_S2D3.1
N$11: OP_HOWLB.3 R_HOWB2.1 R_HOWB3.1
N$12: OP_HOWLB.2 R_HOWB1.1 R_HOWB5.1
N$13: JP_OUT.2 R_HOWB3.2 R_HOWB4.1
N$14: JP_OUT.1 R_HOWA3.2 R_HOWA5.2
N$15: JP+.2 S1.2
N$16: JP+.1 S1.4
N$17: OP_HOWLA.7 R_HOWA4.1 R_HOWA5.1
N$18: JP-.2 S2.2
N$19: JP-.1 S2.4
N$20: OP_HOWLA.6 R_HOWA2.1 R_HOWA4.2
N$21: LED_VDD.A R_VDD_LED.1
N$22: LED_VSS.A R_VSS_LED.1
N$23: R3.2 U$1.D11
N$24: OP_HOWLB.1 R_HOWB4.2 R_HOWB5.2
N$25: C_DDS8.2 DDS1.3
N$26: OP_GAIN1.1 R_GAIN4.1 R_GAINF1.3 R_S2D7.2 R_S2D8.2 TP_VSIN5.TP
N$27: OP_GAIN1.2 R_GAIN3.2 R_GAIN4.2 R_GAINF1.1
N$28: OP_S2D1.5 R_S2D8.1
N$29: OP_S2D1.1 R_HOWA8.2 R_HOWB6.2 R_S2D5.1 TP_VSIN6.TP
N$30: OP_S2D1.3 R_S2D6.1
N$31: OP_S2D1.2 R_S2D5.2 R_S2D7.1
N$32: OP_HOWLB1.2 R_HOWB7.1 R_HOWB9.1
N$33: JP_OUT1.1 R_HOWA6.2 R_HOWA10.2
N$34: OP_HOWLA1.7 R_HOWA9.1 R_HOWA10.1
N$35: OP_HOWLA1.6 R_HOWA8.1 R_HOWA9.2
N$36: OP_S2D1.6 OP_S2D1.7 R_HOWA7.2 R_HOWB7.2 TP_VSIN7.TP
N$37: OP_HOWLB1.3 R_HOWB6.1 R_HOWB10.1
N$38: OP_HOWLA1.5 R_HOWA6.1 R_HOWA7.1
N$39: JP_OUT1.2 R_HOWB8.1 R_HOWB10.2
N$40: OP_HOWLB1.1 R_HOWB8.2 R_HOWB9.2
N$41: C_DDS12.2 DDS2.3
N$42: OP_GAIN2.1 R_GAIN6.1 R_GAINF2.3 R_S2D11.2 R_S2D12.2 TP_VSIN9.TP
N$43: OP_GAIN2.2 R_GAIN5.2 R_GAIN6.2 R_GAINF2.1
N$44: OP_S2D2.5 R_S2D12.1
N$45: OP_S2D2.1 R_HOWA13.2 R_HOWB11.2 R_S2D9.1 TP_VSIN10.TP
N$46: OP_S2D2.3 R_S2D10.1
N$47: OP_S2D2.2 R_S2D9.2 R_S2D11.1
N$48: OP_HOWLB2.2 R_HOWB12.1 R_HOWB14.1
N$49: JP_OUT2.1 R_HOWA11.2 R_HOWA15.2
N$50: OP_HOWLA2.7 R_HOWA14.1 R_HOWA15.1
N$51: OP_HOWLA2.6 R_HOWA13.1 R_HOWA14.2
N$52: OP_S2D2.6 OP_S2D2.7 R_HOWA12.2 R_HOWB12.2 TP_VSIN11.TP
N$53: OP_HOWLB2.3 R_HOWB11.1 R_HOWB15.1
N$54: OP_HOWLA2.5 R_HOWA11.1 R_HOWA12.1
N$55: JP_OUT2.2 R_HOWB13.1 R_HOWB15.2
N$56: OP_HOWLB2.1 R_HOWB13.2 R_HOWB14.2
N$57: C_DDS16.2 DDS3.3
N$58: OP_GAIN3.1 R_GAIN8.1 R_GAINF3.3 R_S2D15.2 R_S2D16.2 TP_VSIN13.TP
N$59: OP_GAIN3.2 R_GAIN7.2 R_GAIN8.2 R_GAINF3.1
N$60: OP_S2D3.5 R_S2D16.1
N$61: OP_S2D3.1 R_HOWA18.2 R_HOWB16.2 R_S2D13.1 TP_VSIN14.TP
N$62: OP_S2D3.3 R_S2D14.1
N$63: OP_S2D3.2 R_S2D13.2 R_S2D15.1
N$64: OP_HOWLB3.2 R_HOWB17.1 R_HOWB19.1
N$65: JP_OUT3.1 R_HOWA16.2 R_HOWA20.2
N$66: OP_HOWLA3.7 R_HOWA19.1 R_HOWA20.1
N$67: OP_HOWLA3.6 R_HOWA18.1 R_HOWA19.2
N$68: OP_S2D3.6 OP_S2D3.7 R_HOWA17.2 R_HOWB17.2 TP_VSIN15.TP
N$69: OP_HOWLB3.3 R_HOWB16.1 R_HOWB20.1
N$70: OP_HOWLA3.5 R_HOWA16.1 R_HOWA17.1
N$71: JP_OUT3.2 R_HOWB18.1 R_HOWB20.2
N$72: OP_HOWLB3.1 R_HOWB18.2 R_HOWB19.2
N$73: C_DDS20.2 DDS4.3
N$74: OP_GAIN4.1 R_GAIN10.1 R_GAINF4.3 R_S2D19.2 R_S2D20.2 TP_VSIN17.TP
N$75: OP_GAIN4.2 R_GAIN9.2 R_GAIN10.2 R_GAINF4.1
N$76: OP_S2D4.5 R_S2D20.1
N$77: OP_S2D4.1 R_HOWA23.2 R_HOWB21.2 R_S2D17.1 TP_VSIN18.TP
N$78: OP_S2D4.3 R_S2D18.1
N$79: OP_S2D4.2 R_S2D17.2 R_S2D19.1
N$80: OP_HOWLB4.2 R_HOWB22.1 R_HOWB24.1
N$81: JP_OUT4.1 R_HOWA21.2 R_HOWA25.2
N$82: OP_HOWLA4.7 R_HOWA24.1 R_HOWA25.1
N$83: OP_HOWLA4.6 R_HOWA23.1 R_HOWA24.2
N$84: OP_S2D4.6 OP_S2D4.7 R_HOWA22.2 R_HOWB22.2 TP_VSIN19.TP
N$85: OP_HOWLB4.3 R_HOWB21.1 R_HOWB25.1
N$86: OP_HOWLA4.5 R_HOWA21.1 R_HOWA22.1
N$87: JP_OUT4.2 R_HOWB23.1 R_HOWB25.2
N$88: OP_HOWLB4.1 R_HOWB23.2 R_HOWB24.2
N$89: C_DDS24.2 DDS5.3
N$90: OP_GAIN5.1 R_GAIN12.1 R_GAINF5.3 R_S2D23.2 R_S2D24.2 TP_VSIN21.TP
N$91: OP_GAIN5.2 R_GAIN11.2 R_GAIN12.2 R_GAINF5.1
N$92: OP_S2D5.5 R_S2D24.1
N$93: OP_S2D5.1 R_HOWA28.2 R_HOWB26.2 R_S2D21.1 TP_VSIN22.TP
N$94: OP_S2D5.3 R_S2D22.1
N$95: OP_S2D5.2 R_S2D21.2 R_S2D23.1
N$96: OP_HOWLB5.2 R_HOWB27.1 R_HOWB29.1
N$97: JP_OUT5.1 R_HOWA26.2 R_HOWA30.2
N$98: OP_HOWLA5.7 R_HOWA29.1 R_HOWA30.1
N$99: OP_HOWLA5.6 R_HOWA28.1 R_HOWA29.2
N$100: OP_S2D5.6 OP_S2D5.7 R_HOWA27.2 R_HOWB27.2 TP_VSIN23.TP
N$101: OP_HOWLB5.3 R_HOWB26.1 R_HOWB30.1
N$102: OP_HOWLA5.5 R_HOWA26.1 R_HOWA27.1
N$103: JP_OUT5.2 R_HOWB28.1 R_HOWB30.2
N$104: OP_HOWLB5.1 R_HOWB28.2 R_HOWB29.2
SW_DIN: R7.2 R8.1 U1.3
SW_DIN_5V: R7.1 U$1.D4
SW_SCLK: R5.2 R6.1 U1.1
SW_SCLK_5V: R5.1 U$1.D9
SW_~RESET: R10.2 R13.2 U1.23
SW_~RESET_5V: R10.1 U$1.D3
SW_~SYNC: R9.2 R12.2 U1.24
SW_~SYNC_5V: R9.1 U$1.D2
VDD: C_CLK_BYP.1 C_DDS1.1 C_DDS2.1 C_DDS3.1 C_DDS5.1 C_DDS6.1 C_DDS7.1 C_DDS9.1 C_DDS10.1 C_DDS11.1 C_DDS13.1 C_DDS14.1 C_DDS15.1 C_DDS17.1 C_DDS18.1 C_DDS19.1 C_DDS21.1 C_DDS22.1 C_DDS23.1 C_OPA1.1 C_OPA3.1 C_OPA5.1 C_OPA7.1 C_OPA9.1 C_OPA11.1 C_OPB1.1 C_OPB3.1 C_OPB5.1 C_OPB7.1 C_OPB9.1 C_OPB11.1 C_OPC1.1 C_OPC3.1 C_OPC5.1 C_OPC7.1 C_OPC9.1 C_OPC11.1 C_OPD1.1 C_OPD3.1 C_OPD5.1 C_OPD7.1 C_OPD9.1 C_OPD11.1 CLOCK.1 DDS1.2 DDS2.2 DDS3.2 DDS4.2 DDS5.2 DDS.2 OP_GAIN1.8 OP_GAIN2.8 OP_GAIN3.8 OP_GAIN4.8 OP_GAIN5.8 OP_GAIN.8 OP_HOWLA1.8 OP_HOWLA2.8 OP_HOWLA3.8 OP_HOWLA4.8 OP_HOWLA5.8 OP_HOWLA.8 OP_HOWLB1.8 OP_HOWLB2.8 OP_HOWLB3.8 OP_HOWLB4.8 OP_HOWLB5.8 OP_HOWLB.8 OP_S2D1.8 OP_S2D2.8 OP_S2D3.8 OP_S2D4.8 OP_S2D5.8 OP_S2D.8 R_SET.1 R_VDD_LED.2 S1.1 TP_VDD.TP U1.2
VOUT: C_DECOUP.1 DDS.10 TP_VSIN.TP
VOUT1: C_DECOUP1.1 DDS1.10 TP_VSIN4.TP
VOUT2: C_DECOUP2.1 DDS2.10 TP_VSIN8.TP
VOUT3: C_DECOUP3.1 DDS3.10 TP_VSIN12.TP
VOUT4: C_DECOUP4.1 DDS4.10 TP_VSIN16.TP
VOUT5: C_DECOUP5.1 DDS5.10 TP_VSIN20.TP
VSIN: C_DECOUP.2 OP_GAIN.3 R_DECOUP.1
VSIN1: C_DECOUP1.2 OP_GAIN1.3 R_DECOUP1.1
VSIN2: C_DECOUP2.2 OP_GAIN2.3 R_DECOUP2.1
VSIN3: C_DECOUP3.2 OP_GAIN3.3 R_DECOUP3.1
VSIN4: C_DECOUP4.2 OP_GAIN4.3 R_DECOUP4.1
VSIN5: C_DECOUP5.2 OP_GAIN5.3 R_DECOUP5.1
VSS: C_OPA2.1 C_OPA4.1 C_OPA6.1 C_OPA8.1 C_OPA10.1 C_OPA12.1 C_OPB2.1 C_OPB4.1 C_OPB6.1 C_OPB8.1 C_OPB10.1 C_OPB12.1 C_OPC2.1 C_OPC4.1 C_OPC6.1 C_OPC8.1 C_OPC10.1 C_OPC12.1 C_OPD2.1 C_OPD4.1 C_OPD6.1 C_OPD8.1 C_OPD10.1 C_OPD12.1 OP_GAIN1.4 OP_GAIN2.4 OP_GAIN3.4 OP_GAIN4.4 OP_GAIN5.4 OP_GAIN.4 OP_HOWLA1.4 OP_HOWLA2.4 OP_HOWLA3.4 OP_HOWLA4.4 OP_HOWLA5.4 OP_HOWLA.4 OP_HOWLB1.4 OP_HOWLB2.4 OP_HOWLB3.4 OP_HOWLB4.4 OP_HOWLB5.4 OP_HOWLB.4 OP_S2D1.4 OP_S2D2.4 OP_S2D3.4 OP_S2D4.4 OP_S2D5.4 OP_S2D.4 R_VSS_LED.2 S2.3 TP_VSS.TP